# EAGLE board gyro (EAGLE 7.2.0)
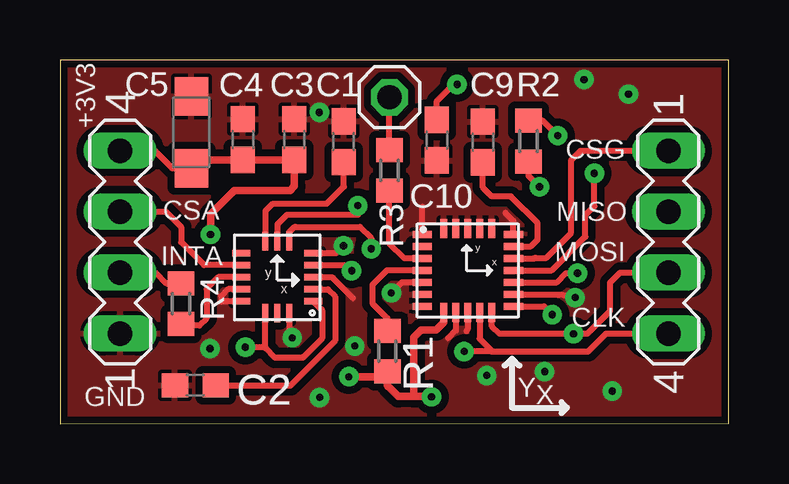
[diagram p0: board, top side]
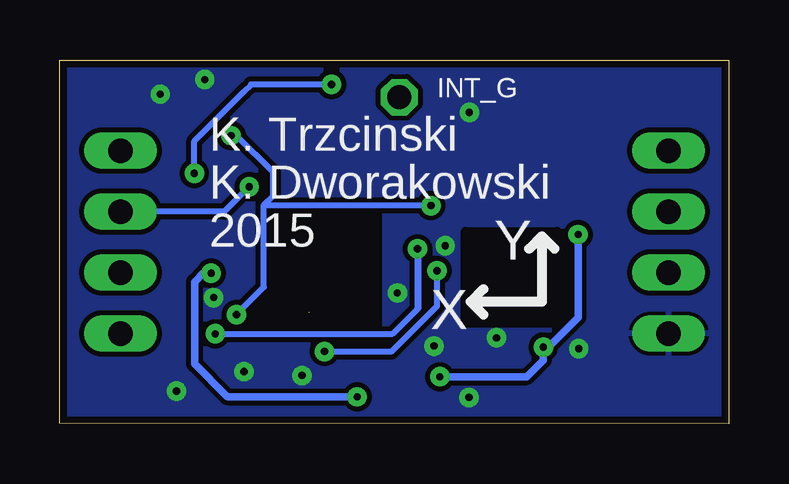
[diagram p1: board, bottom side, seen from below]

Size 27.86 x 15.17 mm. Coordinates in mm from the lower left corner, seen from the top.
Outline: 0,0 27.86,0.01 27.86,15.17 0,15.17 0,0
Copper layers (1*16): Top 0.035mm / dielectric 1.5mm / Bottom 0.035mm
Design rules "default *": minimum track width 8mil, minimum drill 0.3mm, track to track 8mil, track to pad 8mil, pad to pad 8mil, via to via 8mil, smd to smd 3mil, copper to edge 12mil, drill to drill 8mil, minimum pad ring 10mil, minimum via ring 10mil, stop-mask expansion 4mil, vias tented up to drill 0mil, thermal gap 6mil

## Footprints (pad centres in the part's own frame; a part is rotated, then mirrored left to right if it is on the bottom)
C0603 = smd 1.1 x 1: 1 -0.85,0; 2 0.85,0
SMC_A = smd 1.6 x 1.4: + -1.5,0; - 1.5,0
QFN24-4X4 = smd 0.8 x 0.3: GND1 -1.85,1.5; GND2 -1.85,-0.5; GND3 1.95,-1; GND4 1.95,1.5; INT1 -1.85,0.5; PWR_CTRL -1.85,1; RGND -1.85,-1; RGND1 -1.85,-1.5; RST_B -1.85,0; SA0/MISO 1.95,-1.5; SPI_CS_B 1.95,0.5; VDD 1.95,-0.5; VDDIO 1.95,1; VREGD 1.95,0 | smd 0.3 x 0.8: I2C_B/SPI -0.95,-1.75; RGND2 -0.45,-1.75; RGND3 0.05,-1.75; RGND4 1.05,1.75; RGND5 0.55,1.75; RGND6 0.05,1.75; RGND7 -0.45,1.75; RGND8 -0.95,1.75; SCL/SCLK 0.55,-1.75; SDA/MOSI 1.05,-1.75
1X01 = drill 1.016 octagon: 1 0,0
R0603 = smd 1 x 1.1: 1 -0.85,0; 2 0.85,0
MA04-1 = drill 1.016 long: 1 -3.81,0; 2 -1.27,0; 3 1.27,0; 4 3.81,0
QFN16-5X3 = smd 0.77 x 0.27: P$1 -1.497,0.989; P$2 -1.497,0.489; P$3 -1.497,-0.011; P$4 -1.497,-0.511; P$5 -1.497,-1.011; P$9 1.503,-1.011; P$10 1.503,-0.511; P$11 1.503,-0.011; P$12 1.503,0.489; P$13 1.503,0.989 | smd 0.27 x 0.77: P$6 -0.497,-1.511; P$7 0.003,-1.511; P$8 0.503,-1.511; P$14 0.503,1.489; P$15 0.003,1.489; P$16 -0.497,1.489

## Placement (x,y rotation side)
C1  100n  [C0603]  11.82,11.76 90 top
C2  100n  [C0603]  5.64,1.6 0 top
C3  100n  [C0603]  9.77,11.85 90 top
C4  100n  [C0603]  7.62,11.85 270 top
C5  tant-a-4u7  [SMC_A]  5.47,12.15 90 top
C9  100n  [C0603]  17.61,11.75 270 top
C10  100n  [C0603]  15.71,11.83 270 top
IC3  FXAS21002C  [QFN24-4X4]  16.94,6.39 0 top
INT_G  [1X01]  13.73,13.61 0 top
R1  [R0603]  13.64,3.02 270 top
R2  [R0603]  19.52,11.79 90 top
R3  [R0603]  13.73,10.57 90 top
R4  [R0603]  5.04,5 90 top
SPI  [MA04-1]  25.35,7.57 270 top
U$2  FXOS8700CQR1  [QFN16-5X3]  9.06,6.1 180 top
ZAS  [MA04-1]  2.5,7.57 90 top

## Library data of the parts
C1-C5 C9 C10 R1-R4 = rcl
IC3 U$2 = _microMouse
INT_G = pinhead
SPI ZAS = con-lstb; OC_FARNELL: unknown; OC_NEWARK: unknown

## Nets
+3V3: C3.1 C4.2 C5.+ IC3.I2C_B/SPI IC3.VDD R1.2 U$2.P$1 U$2.P$14 ZAS.4
CS_A: U$2.P$10 ZAS.3
CS_G: IC3.SPI_CS_B SPI.1
GND: C1.2 C2.1 C3.2 C4.1 C5.- C9.1 C10.2 IC3.GND1 IC3.GND2 IC3.GND3 IC3.GND4 IC3.RGND IC3.RGND1 IC3.RGND2 IC3.RGND3 IC3.RGND4 IC3.RGND5 IC3.RGND6 IC3.RGND7 IC3.RGND8 U$2.P$3 U$2.P$5 U$2.P$12 U$2.P$13 U$2.P$16 ZAS.1
INT_A: R4.1 U$2.P$11
MISO: IC3.SA0/MISO R2.2 U$2.P$7
MOSI: IC3.SDA/MOSI SPI.3 U$2.P$6
N$1: R2.1 SPI.2
N$2: INT_G.1 R3.2
N$3: IC3.INT1 R3.1
N$4: R4.2 ZAS.2
N$6: C1.1 U$2.P$8
N$7: C2.2 U$2.P$2
N$26: C10.1 IC3.VREGD
N$27: IC3.PWR_CTRL
N$30: IC3.RST_B R1.1
SCLK: IC3.SCL/SCLK SPI.4 U$2.P$4
VDDIO: C9.2 IC3.VDDIO

## Tracks (layer width: path | path; a pad name or v marks a point on that pad's centre or on a via)
+3V3  (via drill 0.3)
  Top 0.254: IC3.VDD arc-45 18.93,5.89 20.7,5.89 21.08,6.27 v21.56,6.27 | U$2.P$1 arc-45 U$2.P$1 10.89,4.76 arc-45 10.92,4.69 10.92,3.56 10.15,2.79 arc-45 10.08,2.74 8.95,2.74 8.58,3.13 arc-45 8.55,3.2 | 8.55,3.2 arc-45 8.52,3.19 v7.72,3.19 | 8.55,3.2 U$2.P$14 | 6.27,7.93 v6.27,7.89 | IC3.I2C_B/SPI 15.99,4.22 | ZAS.4 3.95,11.38 4.67,10.65 C5.+
  Top 0.305: v15.48,1.12 arc45 15.45,1.13 14.73,1.13 | 14.73,1.13 14.1,1.13 13.67,1.56 arc-45 13.64,1.63 R1.2 13.45,1.98 arc-45 13.49,1.95 v12.04,1.95 | 15.99,4.22 15.68,3.91 15.05,3.91 14.73,3.59 14.73,1.13 | C5.+ 5.68,11 C4.2 C3.1 9.77,9.91 9.59,9.73 7.26,9.73 6.27,8.74 6.27,7.93
  Bottom 0.254: 7.52,3.19 v7.72,3.19
  Bottom 0.305: v15.48,1.12 20.84,1.12 arc45 20.91,1.15 22.25,2.49 22.25,5.92 21.89,6.27 v21.56,6.27 | v12.04,1.95 8.42,1.95 7.75,2.63 arc-45 7.72,2.7 v7.72,3.19 | 7.52,3.19 6.27,4.43 v6.27,7.89
CS_A
  Top 0.254: ZAS.3 4.41,8.84 5.04,8.2 5.04,7.57 6,6.61 U$2.P$10
CS_G
  Top 0.254: IC3.SPI_CS_B 19.74,6.89 arc45 19.81,6.92 20.27,6.92 21.3,7.95 21.3,10.99 21.69,11.38 SPI.1
GND  (via drill 0.3)
  Top 0.254: IC3.GND3 arc45 IC3.GND3 20.89,5.39 v21.46,5.26 | IC3.GND1 15.1,7.9 15.1,9.04 | IC3.GND4 18.89,8.45 18.55,8.79 | U$2.P$16 9.55,3.71 v9.68,3.58 | IC3.GND2 14.24,5.89 v13.8,5.45 | IC3.RGND2 16.49,3.88 16.17,3.56 | IC3.RGND3 16.99,3.95 16.93,3.86 | U$2.P$5 11.5,7.11 v11.81,7.42 | U$2.P$12 7.02,5.61 6.72,5.31 6.72,5.08 arc-90 6.74,5.11 U$2.P$13 | U$2.P$3 11.33,6.11 12.2,5.23
  other vias: 17.78,2.01 6.25,3.12 21.83,14.35 10.81,12.98 23.69,13.74 20.19,2.17 23.01,1.36 10.82,1.09 12.28,3.24
  pour Top (isolate 0.305): -0.79,15.82 27.9,15.82 27.9,-0.69 -0.79,-0.69
  pour Bottom (isolate 0.203): -0.83,15.82 27.9,15.82 27.9,-0.69 -0.83,-0.69
INT_A
  Top 0.254: U$2.P$11 6.6,6.11 6.11,5.61 6.11,4.39 5.8,4.09 5.11,4.09 R4.1
MISO  (via drill 0.3)
  Top 0.254: U$2.P$7 arc45 9.07,7.65 9.07,8.32 9.43,8.68 arc-45 9.5,8.71 12.41,8.71 v12.41,9.09 | IC3.SA0/MISO 20.17,4.89 v20.51,4.55 | v20.74,12.01 20.12,12.64 R2.2
  Bottom 0.254: v20.51,4.55 19.37,5.69 19.37,9.12 | v12.41,9.09 19.34,9.09 19.37,9.12 | 19.37,9.12 18.99,9.5 18.99,10.49 20.51,12.01 v20.74,12.01
MOSI  (via drill 0.3)
  Top 0.254: U$2.P$6 arc-45 U$2.P$6 9.55,7.99 9.74,8.17 arc-45 9.81,8.2 12.5,8.2 12.97,7.73 v12.97,7.29 | SPI.3 23.34,6.3 22.92,5.88 22.92,4.7 21.97,3.75 v21.39,3.75 18.31,3.75 18,4.06 IC3.SDA/MOSI
  Bottom 0.254: 12.97,4.79 14.01,3.75 v21.39,3.75
  Bottom 0.3: v12.97,7.29 12.97,4.79
N$1  (via drill 0.3)
  Top 0.254: R2.1 19.52,10.34 v19.98,9.88
  Bottom 0.254: v19.98,9.88 21.02,8.84 SPI.2
N$2
  Top 0.254: R3.2 INT_G.1
N$3
  Top 0.254: IC3.INT1 14.36,6.89 13.73,7.52 R3.1 14.11,9.34
N$4
  Top 0.254: ZAS.2 3.99,6.3 4.43,5.85 R4.2
N$6
  Top 0.254: U$2.P$8 8.55,8.82 arc-45 8.58,8.89 8.86,9.17 11.11,9.17 11.82,9.88 C1.1
N$7
  Top 0.254: U$2.P$2 11.16,5.6 11.47,5.3 11.47,3.45 9.61,1.6 C2.2
N$26  (via drill 0.3)
  Top 0.254: v22.26,10.44 22.26,9.07 21.89,8.7 21.89,7.8 20.48,6.39 IC3.VREGD | C10.1 15.7,13.46 16.4,14.15 v16.55,14.15
  Bottom 0.254: v22.26,10.44 22.26,11.79 20.21,13.84 19.9,14.15 v16.55,14.15
N$30
  Top 0.254: IC3.RST_B 13.62,6.39 13.02,5.78 13.02,5.01 13.64,4.39 R1.1
SCLK  (via drill 0.3)  (1 unrouted)
  Top 0.254: U$2.P$4 arc-45 U$2.P$4 11.85,6.61 v12.15,6.38 | IC3.SCL/SCLK 17.49,3.54 17.98,3.05 | 17.98,3.05 arc-45 18,3.01 22.01,3.01 22.76,3.76 SPI.4 | 17.98,3.05 18,3.04 18.01,3.04 17.98,3.01 v16.84,3.01
  Bottom 0.254: 12.15,6.24 v12.15,6.38 12.15,4.9 14.05,3.01 v16.84,3.01
VDDIO
  Top 0.254: IC3.VDDIO 19.62,7.39 19.9,7.67 19.9,8.36 18.78,9.47 18,9.47 17.61,9.86 C9.2 17.61,10.64

## Text on the board
tPlace: Y | X
bPlace: Y | X
tNames: +3V3 | CSG | CSA | MISO | MOSI | INTA | CLK | GND
bNames: K. Trzcinski / K. Dworakowski / 2015
_tNames: C5 | C3 | C1 | R2 | C4 | C9 | C10 | R3 | R4 | R1 | C2
_bNames: INT_G